# Altium PCB dht11-pcb.PcbDoc
Units mil, origin at the board's own origin, x right, y up, seen from the top; angles counter-clockwise.
Board outline 2115 x 2690 mil, 2 copper layers (Top Layer, Bottom Layer); 49 components, 31 nets, 189 pads, 154 vias.
Unrouted connection lines stored in the file: 35.
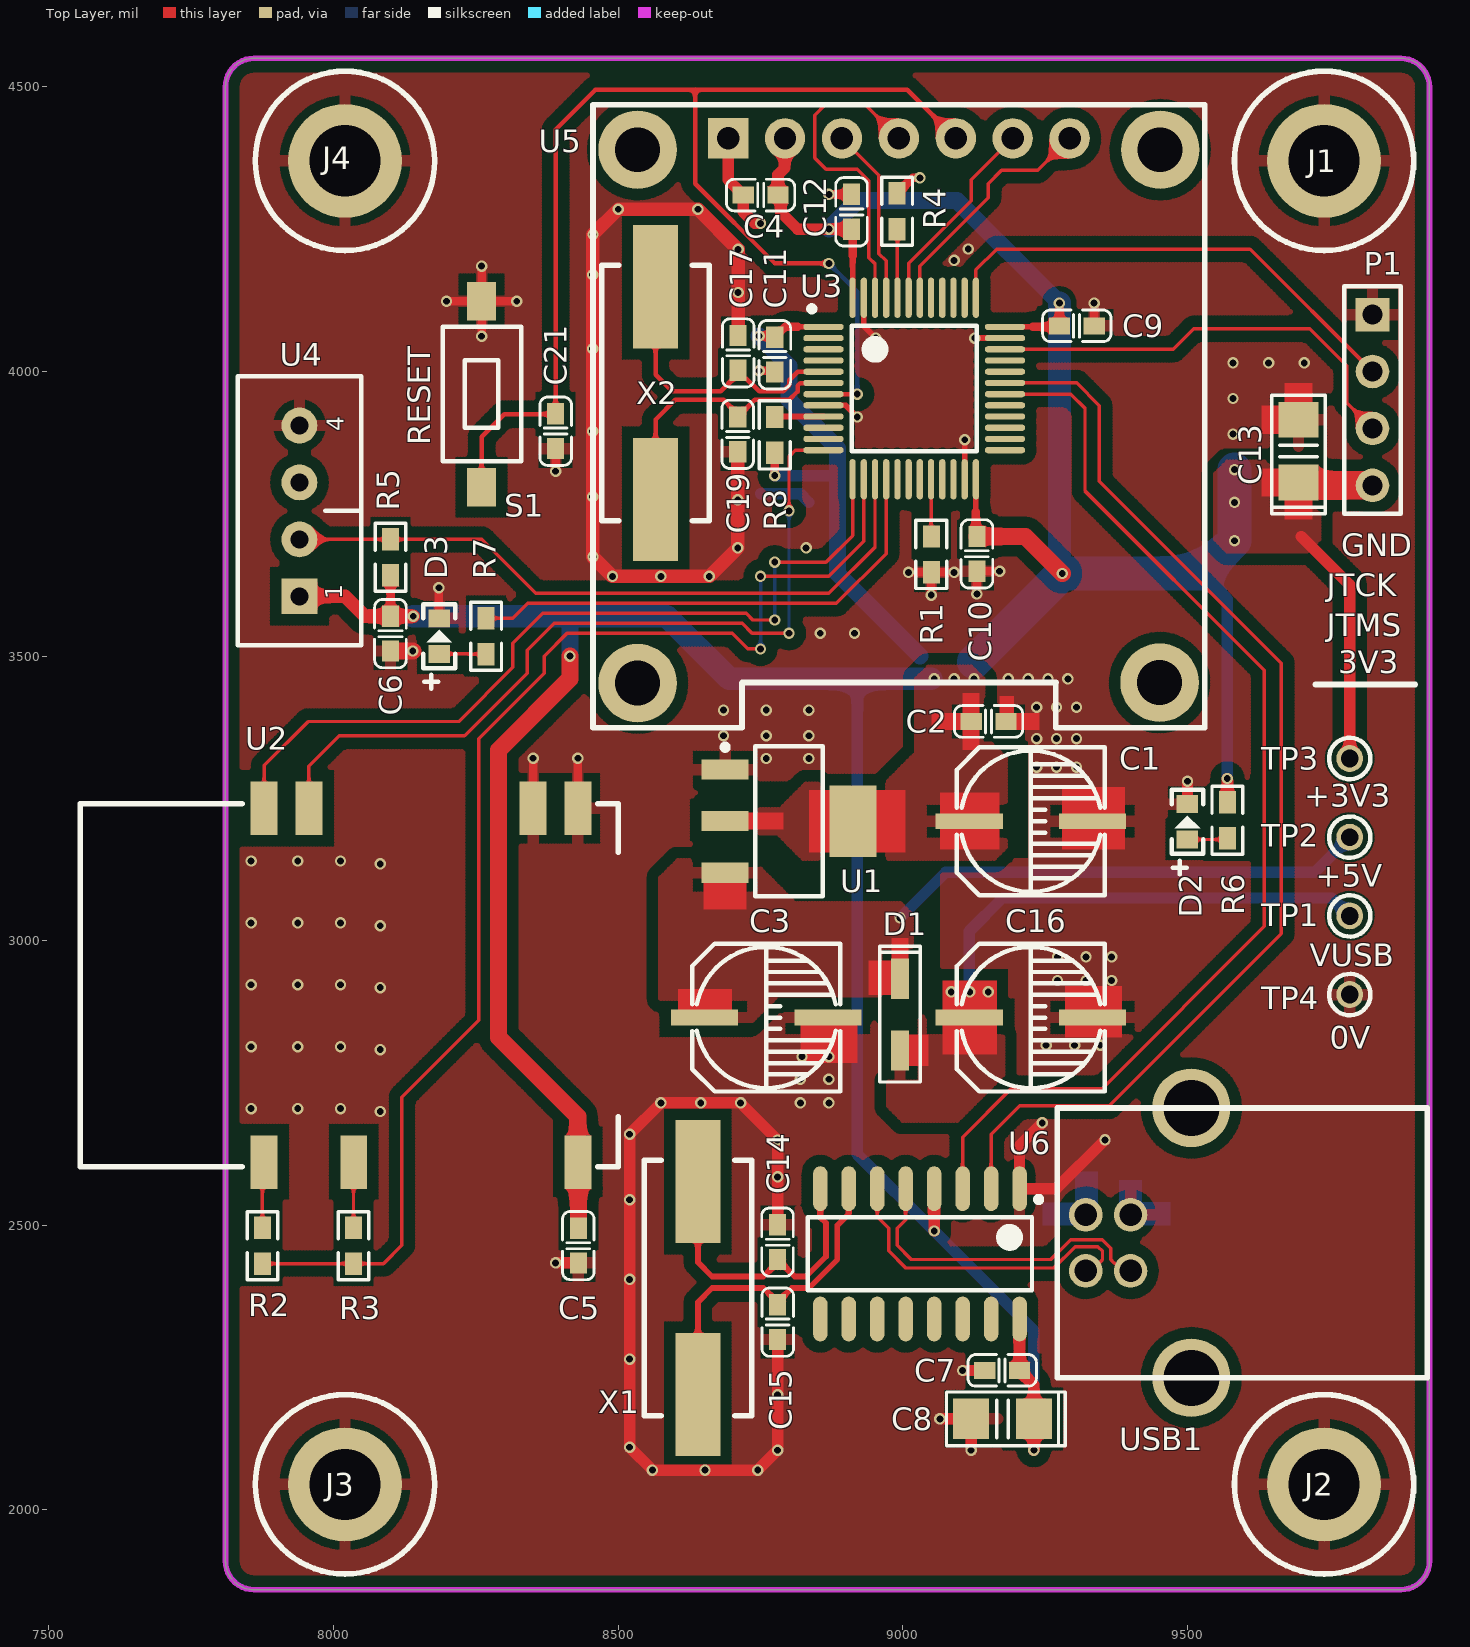
[diagram p0: Top Layer view]
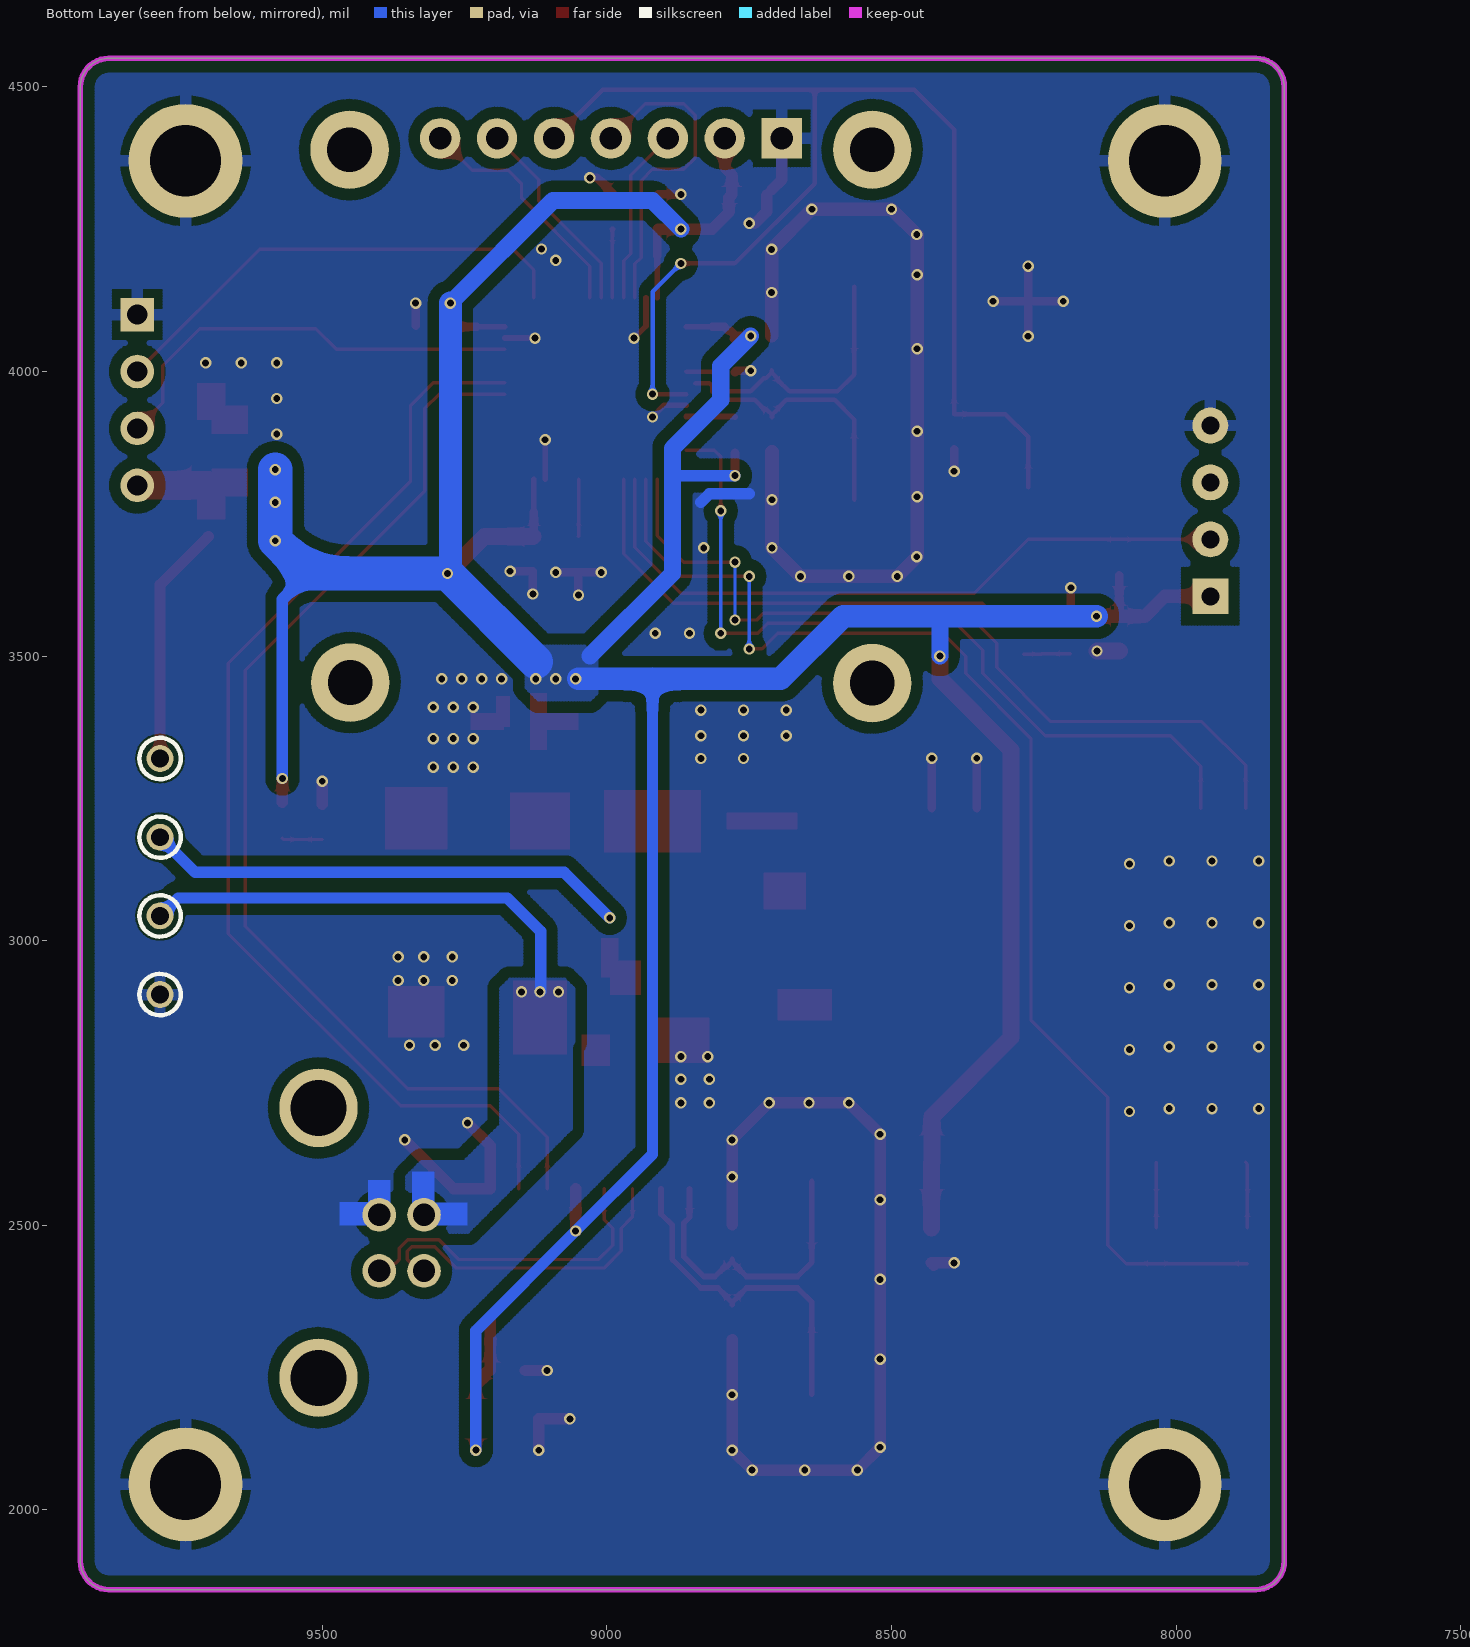
[diagram p1: Bottom Layer view, seen from below]
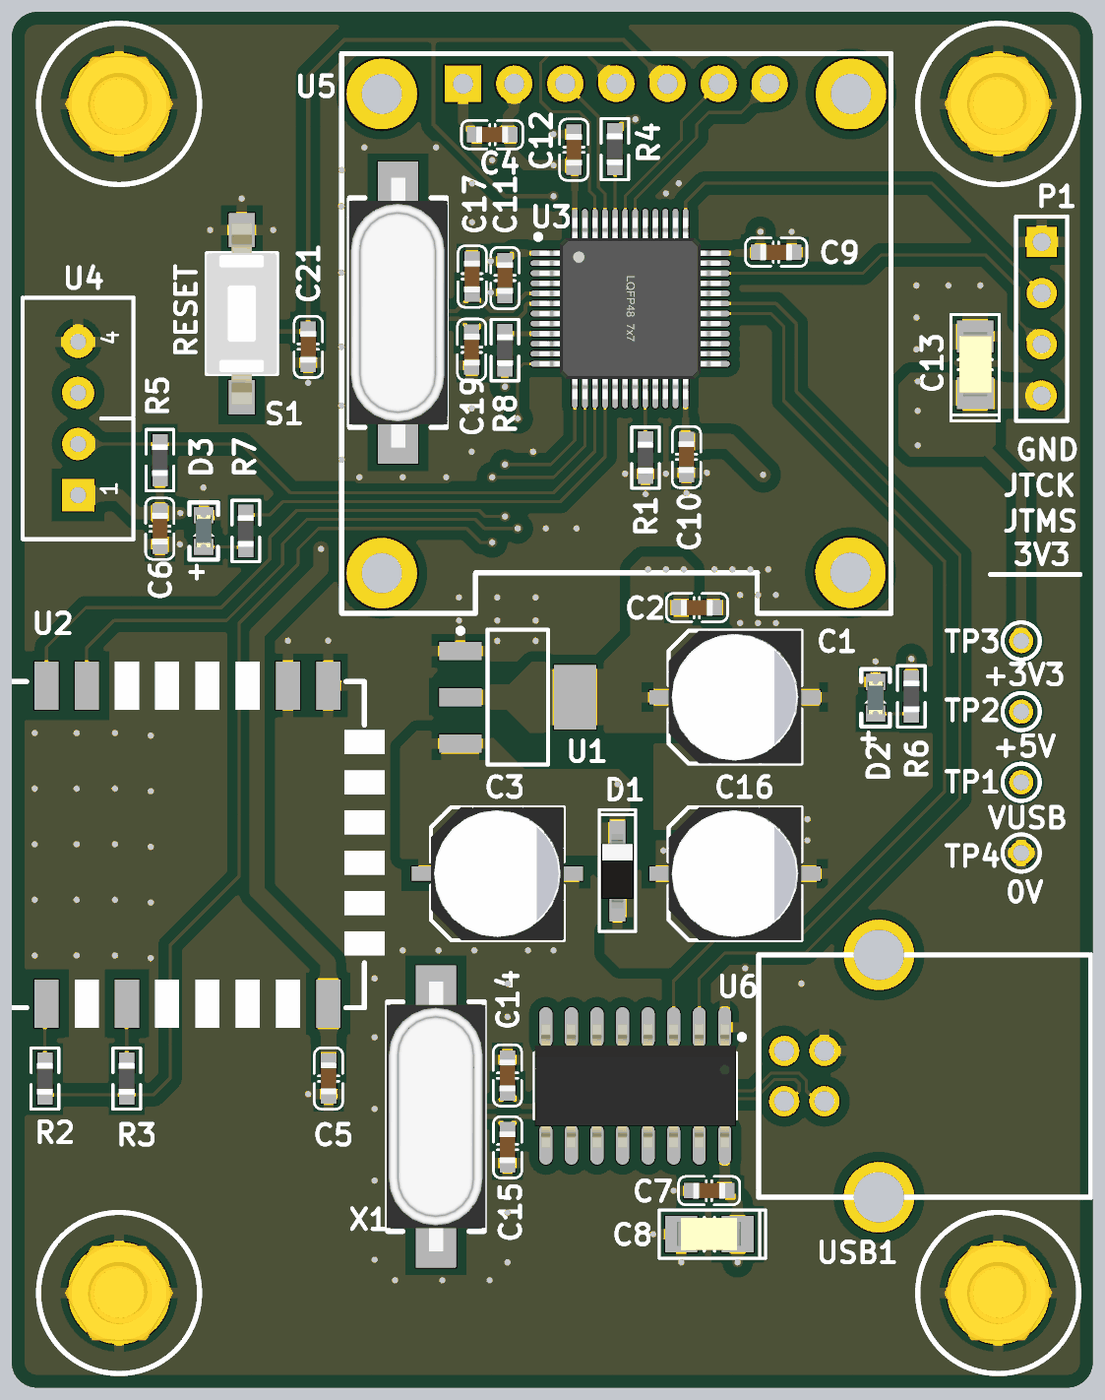
[diagram p2: 3D render of the assembled board from above, using the file's embedded part models]

## Layer stack, top to bottom
Top Solder: solder mask 0.4, Solder Resist, Dk 3.5
Top Layer: signal copper 1.4
Dielectric 1: dielectric 12.6, FR-4, Dk 4.8
Bottom Layer: signal copper 1.4
Bottom Solder: solder mask 0.4, Solder Resist, Dk 3.5

## Board outline
7810,1910 7810,4500 cw(c7860,4500) 7860,4550 9875,4550 cw(c9875,4500) 9925,4500 9925,1910 cw(c9875,1910) 9875,1860 7860,1860 cw(c7860,1910)

## Design rules (kind name [scope] priority, off if disabled: settings)
Clearance [All] p1: gap=6 ignorepadtopadclearanceinfootprint=TRUE except(10: Arc-Via Track-Via SMDPad-Via THPad-Via Via-Via; 20: Arc-Fill Arc-Poly Arc-Region Track-Fill Track-Poly Track-Region SMDPad-Fill SMDPad-Poly SMDPad-Region THPad-Fill THPad-Poly THPad-Region Via-Fill Via-Poly Via-Region Fill-Fill Fill-Poly Fill-Region Poly-Poly Poly-Region Region-Region)
PolygonConnect PolygonConnect_via [isvia] p1: connectstyle=Direct reliefconductorwidth=10 reliefentries=4 polygonreliefangle="90 Angle" airgapwidth=10
PolygonConnect [All] p2: connectstyle=Relief reliefconductorwidth=20 reliefentries=4 polygonreliefangle="90 Angle" airgapwidth=15
RoutingVias [All] p1: holewidth=12 width=24 viastyle="Through Hole" minholewidth=12 minwidth=24 maxholewidth=12 maxwidth=24
SolderMaskExpansion [All] p1: expansion=2.5
Width Width_POWER [InNetClass('POWER')] p1: maxlimit=60 minlimit=10 preferedwidth=15
Width [All] p2: maxlimit=10 minlimit=6 preferedwidth=6
30 further rules are at their usual default settings.

## Classes and differential pairs
net class MISC: LED0 NetC14_2 NetC15_2 NetD2_1 NetD3_1 NetR1_1 NetR2_2 NetR3_2 NetR4_1 NetR8_2 PA5/DATA WIFI_EN
net class USART: PA2/USART2_TXD PA3/USART2_RXD PA9/USART1_TXD PA10/USART1_RXD
net class OLED: OLED_CS OLED_D0 OLED_D1 OLED_DC
net class POWER: GND VCC_3V3 VCC_5V VCC_USB

## Components (designator, comment, footprint, x,y, rotation, side; value= is the part's Value field where it differs from the comment)
C1 "220uF" C_SMD(6.3x5.3) 9225,3210 r0 top
C2 "0.1uF" C0603 9150.51,3385 r180 top
C3 "220uF/10V" C_SMD(6.3x5.3) 8760,2865 r0 top
C4 "0.1uF" C0603 8750,4310 r0 top
C5 "0.1uF" C0603 8430,2464.49 r270 top
C6 "0.1uF" C0603 8100,3539.49 r270 top
C7 "0.1uF" C0603 9174.49,2245 r180 top
C8 "10uF" TAC1206 9175,2160 r180 top
C9 "0.1uF" C0603 9305.51,4080 r180 top
C10 "0.1uF" C0603 9130,3679.49 r90 top
C11 "0.1uF" C0603 8775,4029.49 r90 top
C12 "0.1uF" C0603 8910,4280.51 r270 top
C13 "10uF" TAC1206 9695,3860 r90 top
C14 "22pF" C0603 8780.02,2470.47 r270 top
C15 "22pF" C0603 8780.02,2329.96 r90 top
C16 "220uF/10V" C_SMD(6.3x5.3) 9225,2865 r0 top
C17 "22pF" C0603 8710.62,4032.46 r90 top
C19 "22pF" C0603 8710,3889.49 r270 top
C21 "0.1uF" C0603 8390,3895 r90 top
D1 "1N5819" SOD123 8995,2870 r90 top
D2 "LED" LED_0603 9500,3208.9 r90 top
D3 "LED" LED_0603 8185.69,3535 r90 top
J1 "Hole-3mmx6mm" M3x7+6_L 9740,4370 r0 top
J2 "Hole-3mmx6mm" M3x7+6_L 9740,2045 r0 top
J3 "Hole-3mmx6mm" M3x7+6_L 8020,2045 r0 top
J4 "Hole-3mmx6mm" M3x7+6_L 8020,4370 r0 top
P1 "Download" HDR1X4 9825,4099.88 r270 top
R1 "10K" R0603 9050,3678.5 r270 top
R2 "1K" R0603 7875,2464.19 r90 top
R3 "1K" R0603 8035,2464.19 r90 top
R4 "10K" R0603 8990,4281.5 r90 top
R5 "4K7" R0603 8100,3673.5 r270 top
R6 "1K" R0603 9570,3211.5 r270 top
R7 "1K" R0603 8268,3535 r270 top
R8 "0R" R0603 8775,3888.5 r90 top
S1 "SW-PB" "micro button_2_SMD" 8260,3960 r90 top
TP1 "VUSB" TP 9785,3043.56 r270 top
TP2 "+5V" TP 9785,3181.78 r270 top
TP3 "+3V3" TP 9785,3320 r270 top
TP4 "0V" TP 9785,2905.34 r270 top
U1 "AMS1117-3v3" SOT223_L 8800,3210 r0 top
U2 "ESP8266" ESP8266 8429.13,3240.59 r270 top
U3 "STM32F103C8T6" "LQFP48 7X7_N" 9020,3970 r270 top
U4 "DHT11" DHT11 7940,3755 r90 top
U5 "OLED_0R96" OLED_0.96_SPI 8993,3931 r0 top locked
U6 "CH340" SOIC_16 9030,2450 r270 top
USB1 "USB-B" USB-B 9321.26,2420 r90 top
X1 "12MHz" HC-49SMD 8640,2390 r90 top
X2 "8MHz" HC-49SMD 8565.62,3961.95 r90 top

## Footprints (in the part's own frame and the unit in brackets; to place one, negate y for a bottom-side part, rotate by r counter-clockwise, add the part's x,y. Pads: shape width x height; smd on the part's side, far side on the other; paste and mask are expansions set on the pad)
C0603 [mm] "Chip Capacitor, 2-Leads, Body 1.6x0.8mm, IPC Medium Density"
  rect 0.95x0.762 smd: 1(-0.775,0) 2(0.775,0)
  silkscreen extent -1.53,-0.71 1.53,0.7, body extent -0.8,-0.4 0.8,0.4, height 0.6
C_SMD(6.3x5.3) [mm]
  rect 3x0.7 smd: 1(-2.75,0) 2(2.75,0)
  silkscreen extent -3.3,-3.3 3.3,3.3, body extent -3.3,-3.3 3.3,3.3, height 5.42
DHT11 [mm]
  rect 1.6x1.6 hole 0.8: 1(-3.81,0)
  round 1.6 hole 0.8: 2(-1.27,0) 3(1.27,0) 4(3.81,0)
  silkscreen extent -6,-2.75 6,2.75
ESP8266 [mm]
  rect 2.4x1.2 smd: 1(0.2,0) 2(0.2,-2) 7(0.2,-12) 8(0.2,-14) 9(16,-14) 11(16,-10) 16(16,0)
  rect 2.4x1.2 on Top Overlay: 3(0.2,-4) 4(0.2,-6) 5(0.2,-8) 6(0.2,-10) 10(16,-12) 12(16,-8) 13(16,-6) 14(16,-4) 15(16,-2)
  rect 1.2x2 on Top Overlay: 17(13,1.8) 18(11,1.8) 19(9,1.8) 20(7,1.8) 21(5,1.8) 22(3,1.8)
  silkscreen extent 0,-22.2 16.2,1.8
HC-49SMD [mm]
  rect 5.5x2 smd: 1(-4.75,0) 2(4.75,0)
  silkscreen extent -5.7,-2.4 5.7,2.4, body extent -6.7,-2.46 6.7,2.44, height 4
HDR1X4 [mm] "Connector; Header; 4 Position"
  rect 1.5x1.5 hole 0.9: 1(0,0)
  round 1.5 hole 0.9: 2(2.54,0) 3(5.08,0) 4(7.62,0)
  silkscreen extent -1.27,-1.27 8.89,1.27
LED_0603 [mm]
  rect 0.8x0.96 smd: 1(-0.79,0) 2(0.79,0)
  silkscreen extent -2.35,-0.71 1.42,0.71, body extent -0.81,-0.4 0.81,0.4, height 0.6
"LQFP48 7X7_N" [mm] "7*7*1.4(长宽高，除引脚）"
  oval 0.279x1.8 smd: 1(-2.75,-4.05) 2(-2.25,-4.05) 3(-1.75,-4.05) 4(-1.25,-4.05) 5(-0.75,-4.05) 6(-0.25,-4.05) 7(0.25,-4.05) 8(0.75,-4.05) 9(1.25,-4.05) 10(1.75,-4.05) 11(2.25,-4.05) 12(2.75,-4.05) 25(2.75,4.05) 26(2.25,4.05) 27(1.75,4.05) 28(1.25,4.05) 29(0.75,4.05) 30(0.25,4.05) 31(-0.25,4.05) 32(-0.75,4.05) 33(-1.25,4.05) 34(-1.75,4.05) 35(-2.25,4.05) 36(-2.75,4.05)
  oval 1.8x0.279 smd: 13(4.05,-2.75) 14(4.05,-2.25) 15(4.05,-1.75) 16(4.05,-1.25) 17(4.05,-0.75) 18(4.05,-0.25) 19(4.05,0.25) 20(4.05,0.75) 21(4.05,1.25) 22(4.05,1.75) 23(4.05,2.25) 24(4.05,2.75) 37(-4.05,2.75) 38(-4.05,2.25) 39(-4.05,1.75) 40(-4.05,1.25) 41(-4.05,0.75) 42(-4.05,0.25) 43(-4.05,-0.25) 44(-4.05,-0.75) 45(-4.05,-1.25) 46(-4.05,-1.75) 47(-4.05,-2.25) 48(-4.05,-2.75)
  silkscreen extent -3.68,-4.7 2.79,2.79, body extent -4.5,-4.5 4.5,4.5, height 1.45
M3x7+6_L [mil] "M3铜柱，长：7mm，螺纹长：6mm"
  round 200 hole 125: 1(0,0)
  silkscreen extent -157,-157 157,157, body extent -106,-93 106,93, height 278
"micro button_2_SMD" [mm]
  rect 1.7x1.3 smd: 1(-4.15,0) 2(4.15,0)
  silkscreen extent -3,-1.76 3,1.74, body extent -4.5,-1.75 4.5,1.75, height 4.51
OLED_0.96_SPI [mm] "GND、VCC、SCL、SDA"
  round 3.5 hole 2 mask+0.102: 0(-11.659,-12.154) 0(-11.659,11.646) 0(11.633,-12.128) 0(11.659,11.646)
  rect 1.8x1.8 hole 1 mask+0.102: 1(-7.62,12.154)
  round 1.8 hole 1 mask+0.102: 2(-5.08,12.154) 3(-2.54,12.154) 4(0,12.154) 5(2.54,12.154) 6(5.08,12.154) 7(7.62,12.154)
  silkscreen extent -13.65,-14.15 13.65,13.65
R0603 [mm] "Chip Resistor, 2-Leads, Body 1.6x0.8mm, IPC Medium Density"
  rect 1x0.762 smd: 1(-0.8,0) 2(0.8,0)
  silkscreen extent -1.52,-0.69 1.52,0.69, body extent -0.8,-0.4 0.8,0.4, height 0.38
SOD123 [mm]
  rect 1.8x0.8 smd: 1(-1.6,0) 2(1.6,0)
  silkscreen extent -3,-0.9 3.05,0.9, body extent -1.85,-0.8 1.85,0.8, height 1.27
SOIC_16 [mm]
  oval 2x0.65 smd: 1(-2.906,4.445) 2(-2.906,3.175) 3(-2.906,1.905) 4(-2.906,0.635) 5(-2.906,-0.635) 6(-2.906,-1.905) 7(-2.906,-3.175) 8(-2.906,-4.445) 9(2.906,-4.445) 10(2.906,-3.175) 11(2.906,-1.905) 12(2.906,-0.635) 13(2.906,0.635) 14(2.906,1.905) 15(2.906,3.175) 16(2.906,4.445)
  silkscreen extent -2.55,-5 1.63,5.42, body extent -3.06,-5 3.06,5, height 1.48
SOT223_L [mm] "SOT223, 4-Leads, Body 6.5x3.5mm, Pitch 2.3mm, Lead Span 7mm, IPC High Density"
  rect 2.1x0.9 smd: 1(-2.85,2.3) 2(-2.85,0) 3(-2.85,-2.3)
  rect 2.1x3.2 smd: 4(2.85,0)
  silkscreen extent -2.97,-3.35 1.5,3.42, body extent -1.85,-3.35 1.85,3.35, height 1.7
TAC1206 [mm]
  rect 1.6x1.8 smd: 1(-1.4,0) 2(1.4,0)
  silkscreen extent -2.79,-1.2 2.5,1.2, body extent -1.56,-0.81 1.61,0.79, height 1.77
TP [mm]
  round 1.2 hole 0.8: 1(0,0)
  silkscreen extent -0.92,-0.92 0.92,0.92
USB-B [mm]
  round 3.5 hole 2.5: 0(-4.77,-4.71) 0(7.27,-4.71)
  round 1.5 hole 1: 1(2.5,0) 2(0,0) 3(0,-2) 4(2.5,-2)
  silkscreen extent -4.77,-15.24 7.27,1.27

## Part data
C1 C3 C16: library part Cap3, "CAP ALUM POLY 150UF 20% 10V SMD", ESR (Equivalent Series Resistance)="22 mOhm", Lifetime @ Temp.="2000 Hrs @ 105°C", Manufacturer=KEMET, Manufacturer Part Number=A765EB157M1ALAE022, Operating Temperature="-55°C ~ 105°C", Package / Case="Radial, Can - SMD", Ratings=-, Supplier Part Number 1=399-13671-1-ND, Tolerance=±20%, Applications="General Purpose", Category=Capacitors, ComponentLink1Description=https://api.kemet.com/component-edge/download/datasheet/A765EB157M1ALAE022.pdf, ComponentLink1URL=https://api.kemet.com/component-edge/download/datasheet/A765EB157M1ALAE022.pdf, Height - Seated (Max)="0.236\" (6.00mm)", Lead Spacing=-, Mounting Type="Surface Mount", Packaging="Cut Tape (CT)", Part Status=Active, Pricing 1="1=0.62, 10=0.44, 100=0.2899, 500=0.2147 (USD)", RoHS="RoHS Compliant", Size / Dimension="0.248\" Dia (6.30mm)", Stock 1=2690, Supplier 1=Digi-Key, Surface Mount Land Size="0.260\" L x 0.260\" W (6.60mm x 6.60mm)", Type=Polymer
C2 C4 C5 C6 C7 C9 C10 C11 C12 C14 C15 C17 C19 C21: library part Cap1, "CAP CER 10000PF 100V X7R 0603", Manufacturer="TDK Corporation", Manufacturer Part Number=C1608X7R2A103K080AA, Operating Temperature="-55°C ~ 125°C", Package / Case="0603 (1608 Metric)", Ratings=-, Supplier Part Number 1=445-1304-2-ND, Temperature Coefficient=X7R, Tolerance=±10%, Voltage - Rated=100V, Applications="General Purpose", Category=Capacitors, ComponentLink1Description=https://product.tdk.com/info/en/catalog/datasheets/mlcc_commercial_midvoltage_en.pdf, ComponentLink1URL=https://product.tdk.com/info/en/catalog/datasheets/mlcc_commercial_midvoltage_en.pdf, Failure Rate=-, Features=-, Height - Seated (Max)=-, Lead Spacing=-, Lead Style=-, Mounting Type="Surface Mount, MLCC", Notification="Current market demand for these product types have resulted in fluctuating and extending lead times. Lead times may differ.", Packaging="Tape & Reel (TR)", Part Status=Active, Pricing 1="4000=0.01438 (USD)", RoHS="RoHS Compliant", Size / Dimension="0.063\" L x 0.032\" W (1.60mm x 0.80mm)", Stock 1=40000, Supplier 1=Digi-Key, Thickness (Max)="0.035\" (0.90mm)"
C8 C13: library part Cap2, "CAP TANT 10UF 10V 10% 1206", ESR (Equivalent Series Resistance)="3.8 Ohm", Lifetime @ Temp.="2000 Hrs @ 125°C", Manufacturer=KEMET, Manufacturer Part Number=T491A106K010AT7280, Manufacturer Size Code=A, Operating Temperature="-55°C ~ 125°C", Package / Case="1206 (3216 Metric)", Supplier Part Number 1=399-8268-2-ND, Tolerance=±10%, Category=Capacitors, ComponentLink1Description=https://api.kemet.com/component-edge/download/datasheet/T491A106K010AT7280.pdf, ComponentLink1URL=https://api.kemet.com/component-edge/download/datasheet/T491A106K010AT7280.pdf, Failure Rate=-, Features="General Purpose", Height - Seated (Max)="0.071\" (1.80mm)", Lead Spacing=-, Mounting Type="Surface Mount", Notification="Current market demand for these product types have resulted in fluctuating and extending lead times. Lead times may differ.", Packaging="Tape & Reel (TR)", Part Status=Active, Pricing 1="9000=0.084, 18000=0.08138, 27000=0.07875, 63000=0.0735 (USD)", RoHS="RoHS Compliant", Size / Dimension="0.126\" L x 0.063\" W (3.20mm x 1.60mm)", Stock 1=27000, Supplier 1=Digi-Key, Type=Molded
D1: library part Diode, "Default Diode", Code_JEDEC=DO-214-AB, LatestRevisionDate=17-Jul-2002, LatestRevisionNote="Re-released for DXP Platform.", PackageDescription="DO-214-AB/SMC; 2 C-Bend Leads; Body 7.9 x 5.9 mm, inc. leads (LxW)", PackageReference=SMC, PackageVersion=Sep-1996, Published=8-Jun-2000, Publisher="Altium Limited"
D2 D3: "Typical RED GaAs LED", LatestRevisionDate=08-Jul-2005, LatestRevisionNote="Mech Layer 1 removed.", PackageDescription="LED; 2 Leads", PackageReference=LED-1, Published=8-Jun-2000, Publisher="Altium Limited"
J1 J2 J3 J4: library part HOLED
P1 USB1: library part "Header 4", "Header, 4-Pin", LatestRevisionDate=17-Jul-2002, LatestRevisionNote="Re-released for DXP Platform.", Publisher="Altium Limited"
R1 R2 R3 R4 R5 R6 R7 R8: library part R, "贴片电阻", BOM名称=贴片电阻, 学习资源=www.ooocke.com, 版权归属=源创客
S1: "Switch", LatestRevisionDate=17-Jul-2002, LatestRevisionNote="Re-released for DXP Platform.", PackageDescription="Switch; 2 Leads", PackageReference=SPST-2, Published=24-Mar-1999, Publisher="Altium Limited"
TP1 TP2 TP3: library part TP+, "正测试环"
TP4: library part TP-, "负测试环"
U2: library part "ESP8266 Module"
U3: "ARM Cortex-M3 32-bit MCU, 64 KB Flash, 20 KB Internal RAM, 37 I/Os, 48-pin LQFP, -40 to 85 degC, Tray", I/Os (High Current)=37, Operating Frequency(F) (Processor speed) (MHz)=72, Supplier Part Number 1=497-6063-ND, Supply Voltage(Vcc) min (V)=2, A/D Converter="2x12-bit (10 Channel)", ComponentLink1Description="Manufacturer URL", ComponentLink1URL=http://www.st.com/web/en/home.html, ComponentLink2Description=Datasheet, ComponentLink2URL=http://www.st.com/st-web-ui/static/active/en/resource/technical/document/datasheet/CD00161566.pdf, ComponentLink3Description="Package Specification", ComponentLink3URL=http://www.st.com/st-web-ui/static/active/en/resource/technical/document/datasheet/DM00058181.pdf, Core="ARM Cortex-M3", DatasheetVersion="Rev. 16", FLASH Size (Prog) (kB)=64, Internal RAM Size (kB)=20, Mounting Technology="Surface Mount", PackageDescription="48-Pin Low Profile Quad Flat Package, 7 x 7 mm Body, 0.5 mm Pitch", PackageReference=LQFP48, PackageVersion="Rev. 6, 06/2013", Packing=Tray, PartNumber=STM32F103C8T6, Supplier 1=Digi-Key, Supplier 2=Farnell, Supplier 3=Newark, Supplier 4=Newark, Supplier 5=Mouser, Supplier Part Number 2=1447637, Supplier Part Number 3=59M2182, Supplier Part Number 4=57P1222, Supplier Part Number 5=511-STM32F103C8T6
U4: "GROVE TEMP/HUMIDITY SENSOR", Manufacturer="Seeed Technology Co., Ltd", Manufacturer Part Number=101020011, Supplier Part Number 1=1597-1124-ND, Category="Development Boards, Kits, Programmers", ComponentLink1Description=http://www.seeedstudio.com/wiki/Grove-_Temperature_and_Humidity_Sensor, ComponentLink1URL=http://www.seeedstudio.com/wiki/Grove-_Temperature_and_Humidity_Sensor, Contents="Board(s), Cable(s)", Function="Humidity, Temperature", Part Status=Active, Platform=Grove, Pricing 1="1=6.02 (USD)", RoHS="RoHS Compliant", Stock 1=94, Supplier 1=Digi-Key, Type=Sensor, Utilized IC / Part=DHT11
U5: library part OLED_7P_0R96
X1 X2: library part Crystal, "CRYSTAL 12.0000MHZ 18PF SMD", Frequency Stability=±50ppm, Frequency Tolerance=±20ppm, Load Capacitance=18pF, Manufacturer="Abracon LLC", Manufacturer Part Number=ABLS-12.000MHZ-B2-T, Operating Mode=Fundamental, Operating Temperature="-20°C ~ 70°C", Package / Case=HC-49/US, Ratings=-, Supplier Part Number 1=535-9067-2-ND, Category="Crystals, Oscillators, Resonators", ComponentLink1Description=https://abracon.com/Resonators/abls.pdf, ComponentLink1URL=https://abracon.com/Resonators/abls.pdf, Height - Seated (Max)="0.165\" (4.20mm)", Mounting Type="Surface Mount", Packaging="Tape & Reel (TR)", Part Status=Active, Pricing 1="1000=0.136, 3000=0.1275, 5000=0.12325, 10000=0.119 (USD)", RoHS="RoHS Compliant", Size / Dimension="0.449\" L x 0.185\" W (11.40mm x 4.70mm)", Stock 1=85000, Supplier 1=Digi-Key, Type="MHz Crystal"

## Via types
v1: diameter 20, hole 12, Top Layer to Bottom Layer, tented both sides, 154 vias

## Nets (pads, with @x,y where several pads share a name; then routed paths per layer and width w, separated by ;. In a path a pad name is that pad's centre, name@x,y a point inside that pad or via, vN(x,y) a via of type N, cw(c..) or ccw(c..) an arc to the next point about the centre after c; other vN are vias at no path point)
D+: U6.5 USB1.3 | length 575
  Top Layer w6: U6.5 9005,2510 8990,2495 8990,2465 9015,2440 9260,2440 9295,2475 9350,2475 9365,2460 9365,2440 9371.26,2433.74 9371.9,2433.74 9385.64,2420 USB1.3
D-: U6.6 USB1.2 | length 576.9
  Top Layer w6: U6.6 8955,2515 8975,2495 8975,2455 9005,2425 9265,2425 9302.5,2462.5 9342.5,2462.5 9350.78,2454.22 9350.78,2440 9330.78,2420 USB1.2
GND: C1.2 C2.1 C3.2 C4.1 C5.2 C6.2 C7.2 C8.2 C9.1 C10.1 C11.1 C12.1 C13.2 C14.1 C15.1 C16.2 C17.2 C19.2 C21.1 D2.2 D3.2 J1.1 J2.1 J3.1 J4.1 P1.1 R1.2 R4.2 S1.2 TP4.1 U1.1 U2.1 U2.2 U3.8 U3.23 U3.35 U3.47 U4.4 U5.1 U6.1 USB1.4 | length 4966.8
  Top Layer w10: U3.8 8899.53,3940.47 v1(8920,3920) ; U3.47 8931.42,4079.67 v1(8952.5,4058.58) ; U3.23 v1(9108.58,3880) ; v1(9126.42,4058.58) U3.35
  Top Layer w15: v1(8185,3620) 8185,3566.79 D3.2 ; v1(8198.39,4123.39) S1.2 ; v1(8260,4061.77) S1.2 ; v1(8260,4185) S1.2 ; v1(8321.61,4123.39) S1.2 ; U2.2 v1(8350.39,3320.39) ; v1(8390,3824.53) C21.1@8390,3863.5 ; U2.1 v1(8429.13,3320.39) ; v1(8747.44,4001.25) 8772.73,4001.25 C11.1 ; v1(8870,4311.02) C12.1 ; R4.2 9017.01,4340 v1(9030,4340) ; v1(9010,3647.01) R1.2 ; v1(9050,3607.01) R1.2 ; v1(9090,3647.01) R1.2 ; v1(9130,3608.98) C10.1 v1(9170,3648.98) ; C9.1 v1(9336.02,4120)
  Top Layer w20: v1(8390,2433.98) C5.2 C5.2@8426.02,2430 ; U5.1 8693,4336.49 C4.1@8710.79,4318.7 ; C4.1 8719.49,4280.51 8740,4260 v1(8750,4260) ; C15.1 v1(8780.02,2105.02) v1(8745,2070) v1(8560,2070) v1(8520,2110) v1(8520,2660) v1(8575,2715) v1(8715,2715) v1(8780.02,2649.98) C14.1 ; v1(9065,2160) C8.2 ; v1(9105,2245) C7.2 ; v1(9119.88,2105) C8.2@9119.88,2159.88 ; v1(9245,2680) 9205,2640 U6.1 9269.43,2564.43 v1(9355,2650) ; D2.2 v1(9500,3280)
  Top Layer w24: C19.2 v1(8710,3690) v1(8660,3640) v1(8490,3640) 8455,3675 8455,4240 v1(8500,4285) v1(8640,4285) v1(8710.62,4214.38) C17.2
  Top Layer w30: C6.2 v1(8138.98,3508.98)
  Bottom Layer w20: 8750,3785 8820,3785 8835,3770
  other v1: 8652.5,2070 8780.02,2202.23 8520,2265 8520,2405 8520,2545 8780,2585 8082.05,2700 7855,2705 7937.05,2705 8012.05,2705 8645,2715 8820,2715 8870,2715 8820,2756.46 8870,2756.46 8822.73,2796.46 8870,2796.46 8082.05,2808.75 7855,2813.75 7937.05,2813.75 8012.05,2813.75 9251.73,2816.46 9301.73,2816.46 9346.73,2816.46 8082.05,2917.5 7855,2922.5 7937.05,2922.5 8012.05,2922.5 9271.73,2930 9321.73,2930 9366.73,2930 9271.73,2971.46 9321.73,2971.46 9366.73,2971.46 8082.05,3026.25 7855,3031.25 7937.05,3031.25 8012.05,3031.25 8082.05,3135 7855,3140 7937.05,3140 8012.05,3140 9235,3305 9270,3305 9305,3305 8760,3320 8835,3320 9235,3355 9270,3355 9305,3355 8685,3360 8760,3360 8835,3360 8685,3405 8760,3405 8835,3405 9235,3410 9270,3410 9305,3410 9185,3460 9220,3460 9255,3460 9290,3460 8855,3540 8915,3540 8575,3640 8455.6,3674.4 8830,3690 8710,3774.49 8455,3780 9580,3890 8455,3895 9580,3952.5 9580,4015 9642.5,4015 9705,4015 8455,4040 8710.62,4138.68 8455,4170 9090,4195 9115,4215 8455.6,4240.6
JTCK: P1.2 U3.37 | length 849.9
  Top Layer w6: U3.37 9128.27,4178.27 9165,4215 9609.88,4215 P1.2
JTMS: P1.3 U3.34 | length 771.2
  Top Layer w6: U3.34 9475,4038.9 9511.1,4075 9715,4075 9779.94,4010.06 9779.94,3944.94 P1.3
LED0: R7.1 U3.16 | length 880.4
  Top Layer w6: R7.1 8315,3566.5 8341,3592.5 8883.29,3592.5 8970.79,3680 U3.16
NetC14_2: C14.2 U6.8 X1.2 | length 541.6
  Top Layer w10: X1.2 8640,2435 8665,2410 8755,2410 8770.02,2425.02 8770.02,2426.26 C14.2@8780.02,2436.26 ; C14.2 C14.2@8780.02,2436.26 ; U6.8 8855,2514 8865,2504 8865,2445 8830,2410 8809.98,2410 8793.72,2426.26 8790.02,2426.26 C14.2@8780.02,2436.26
NetC15_2: C15.2 U6.7 X1.1 | length 596.8
  Top Layer w10: X1.1 8640,2365 8665,2390 8755,2390 8770.02,2374.98 8770.02,2374.17 C15.2@8780.02,2364.17 ; C15.2 C15.2@8780.02,2364.17 ; U6.7 8905,2520 8885,2500 8885,2440 8835,2390 8805,2390 8790.02,2375.02 8790.02,2374.17 C15.2@8780.02,2364.17
NetD2_1: D2.1 R6.2 | length 70.9
  Top Layer w6: D2.1 9567.8,3177.8 R6.2
NetD3_1: D3.1 R7.2 | length 82.5
  Top Layer w6: D3.1 8236.2,3503.9 8236.59,3503.5 R7.2
NetR1_1: R1.1 U3.20 | length 100.7
  Top Layer w6: U3.20 9049.53,3710.47 R1.1
NetR2_2: R2.2 U2.9 | length 116.2
  Top Layer w6: R2.2 7875,2607.72 U2.9
NetR3_2: R3.2 U2.11 | length 115.2
  Top Layer w6: R3.2 8035,2610.24 U2.11
NetR4_1: R4.1 U3.44 | length 120.7
  Top Layer w6: U3.44 R4.1@8990.47,4249.53
  Top Layer w10: R4.1 R4.1@8990.47,4249.53
NetR8_2: R8.2 U3.9 | length 85.9
  Top Layer w10: R8.2 8775.79,3920.79 U3.9
NRST: C21.2 S1.1 U3.7 U5.5 | length 2269.9
  Top Layer w8: S1.1 8260,3885 8300,3925 8390,3925 C21.2 8390,4425 8460,4495 8635,4495 ; U3.7 v1(8919.84,3960.16) ; v1(8870,4189.69) 8775.31,4189.69 8635,4330 8635,4495 ; U5.5 9007.5,4495 8635,4495
  Bottom Layer w8: v1(8870,4189.69) 8919.84,4139.84 v1(8919.84,3960.16)
OLED_CS: U3.42 U5.7 | length 426.3
  Top Layer w6: U3.42 9029.84,4184.84 9150,4305 9150,4330 9173.25,4353.25 9236.75,4353.25 U5.7
OLED_D0: U3.45 U5.3 | length 312.3
  Top Layer w6: U5.3 8957.89,4344.61 8957.89,4207.11 8970.79,4194.21 U3.45
OLED_D1: U3.46 U5.4 | length 578.1
  Top Layer w6: U3.46 8951.1,4188.9 8940,4200 8940,4335 8920,4355 8865,4355 8845,4375 8845,4450 8865,4470 8932.5,4470 U5.4
OLED_DC: U3.43 U5.6 | length 355.8
  Top Layer w6: U3.43 9010.16,4190.16 9120,4300 9120,4336.5 U5.6
OSC_IN: C17.1 U3.5 X2.2 | length 514.1
  Top Layer w8: X2.2 8565.62,3994.38 8595,3965 8680,3965 8700.62,3985.62 8700.62,3988.25 C17.1@8710.62,3998.25 ; C17.1 C17.1@8710.62,3998.25 ; U3.5 8824.53,3999.53 8815.47,3999.53 8800.52,3984.57 8800.52,3975.52 8790,3965 8747.57,3965 8724.32,3988.25 8720.62,3988.25 C17.1@8710.62,3998.25
OSC_OUT: C19.1 U3.6 X2.1 | length 478.9
  Top Layer w8: X2.1 8565.62,3915.62 8600,3950 8685,3950 8700,3935 8700,3933.7 C19.1@8710,3923.7 ; C19.1 C19.1@8710,3923.7 ; U3.6@8845.16,3979.65 8819.96,3979.65 8815,3974.69 8815,3964.69 8800.31,3950 8740,3950 8723.7,3933.7 8720,3933.7 C19.1@8710,3923.7
PA2/USART2_TXD: U2.7 U3.12 | length 1427.6
  Top Layer w6: U2.7 7956.69,3306.69 8010,3360 8230,3360 8340,3470 8340,3510 8387.5,3557.5 8717.5,3557.5 8735,3540 v1(8800,3540) ; v1(8800,3755) 8800,3850.6 8811.13,3861.73 U3.12
  Bottom Layer w6: v1(8800,3540) v1(8800,3755)
PA3/USART2_RXD: U2.8 U3.13 | length 1467.5
  Top Layer w6: U2.8 7877.95,3307.95 7955,3385 8220,3385 8315,3480 8315,3522.5 8367.5,3575 8725,3575 8736.67,3563.33 v1(8775,3563.33) ; v1(8775,3665) 8865,3665 8911.73,3711.73 U3.13
  Bottom Layer w6: v1@8775,3565 v1(8775,3665)
PA5/DATA: R5.1 U3.15 U4.2 | length 1203.5
  Top Layer w6: U4.2 R5.1 8260,3705 8355,3610 8870,3610 8951.1,3691.1 U3.15
PA9/USART1_TXD: U3.30 U6.3 | length 1965.3
  Top Layer w6: U6.3 9105,2655 9190,2740 9350,2740 9635,3025 9635,3475 9320,3790 9320,3935 9294.84,3960.16 U3.30
PA10/USART1_RXD: U3.31 U6.2 | length 1993.6
  Top Layer w6: U6.2 9155,2660 9205,2710 9362.43,2710 9665,3012.57 9665,3487.43 9345,3807.43 9345,3940 9305.16,3979.84 U3.31
VCC_3V3: C1.1 C2.2 C4.2 C5.1 C6.1 C7.1 C8.1 C9.2 C10.2 C11.2 C12.2 C13.1 P1.4 R5.2 R6.1 R8.1 TP3.1 U1.2 U1.4 U2.16 U3.1 U3.24 U3.36 U3.48 U4.1 U5.2 U6.4 U6.16 | length 8614.7
  Top Layer w10: 8815.28,4078.27 U3.1 ; U3.48 8911.73,4203.27 ; 9128.27,3753.27 U3.24 ; U3.36 9228.27,4078.27
  Top Layer w15: C6.1 R5.2 ; v1(8747.44,4062.27) C11.2@8772.73,4062.27 ; v1(8775,3817.01) R8.1 ; C11.2@8777.51,4057.49 C11.2 8775,4063.7 8782.5,4071.2 8786.2,4071.2 8793.27,4078.27 8815.28,4078.27 ; C12.2 8911.73,4248.27 8911.73,4203.27 ; 9128.27,3753.27 9128.27,3711.73 C10.2 ; 9228.27,4078.27 9273.27,4078.27 C9.2 v1(9275,4120)
  Top Layer w20: U2.16 U2.16@8430,2609.8 ; U5.2 8792.48,4408.98 8792.48,4357.48 8780.51,4345.51 C4.2 8780.82,4310 8785.82,4305 8785.82,4279.18 8815,4250 v1(8870,4250) C12.2 ; v1(9055,2490) U6.4 ; U6.16 C7.1 9208.7,2245 9213.7,2240 9213.7,2236.3 9230,2220 9230,2160.12 C8.1 v1(9230.12,2105.12) ; R6.1 v1(9570,3285) ; 9700,3710 9785,3625 TP3.1
  Top Layer w24: U4.1 8020,3605 8055,3570 C6.1 v1(8140,3570)
  Top Layer w30: v1(8415,3500) 8415,3460 8290,3335 8290,2830 8429.13,2690.87 U2.16 ; C5.1 U2.16@8430,2609.8 ; C10.2 9215,3710 v1(9280,3645) ; C13.1 C13.1@9700,3799.88
  Top Layer w50: C13.1@9700,3799.88 P1.4
  Bottom Layer w20: v1(8775,3817.01) 8882.99,3817.01 ; 8920,3460 8920,2625 v1(9055,2490) 9230.12,2314.88 v1(9230.12,2105.12) ; v1@9275,3650 v1(9280,3645) ; 9525,3645 9570,3600 v1(9570,3285)
  Bottom Layer w30: v1(8415,3500) 8415,3570 ; v1(8747.44,4062.27) 8800,4009.71 8800,3950 8885,3865 8885,3645 9030,3500 ; v1(8870,4250) 8920,4300 9095,4300 v1(9275,4120)
  Bottom Layer w40: v1(8140,3570) 8415,3570 8585,3570 8695,3460 8920,3460 v1@9050,3460 ; v1@9275,3650 v1(9275,4120)
  Bottom Layer w60: 9125,3490 v1(9280,3645) 9525,3645 v1(9582.5,3702.5) v1(9582.5,3827.5)
  other v1: 9055,3460 9090,3460 9125,3460 9582.5,3770
VCC_5V: C3.1 D1.2 TP2.1 U1.3 | length 848.7
  Bottom Layer w20: v1(8995,3040) 9075,3120 9723.22,3120 TP2.1
VCC_USB: C16.1 D1.1 TP1.1 USB1.1 | length 812.7
  Bottom Layer w20: v1(9117.5,2910) 9116.46,2911.04 9116.46,3016.46 9175,3075 9753.56,3075 TP1.1
  other v1: 9085,2910 9150,2910
WIFI_EN: R2.1 R3.1 U3.14 | length 2248.4
  Top Layer w6: R2.1 R3.1 8087.69,2432.69 8120,2465 8120,2725 8255,2860 8255,3355 8370,3470 8370,3500 8410,3540 8700,3540 8727.5,3512.5 v1(8750,3512.5) ; v1(8750,3640) 8870,3640 8931.42,3701.42 U3.14
  Bottom Layer w6: v1(8750,3512.5) v1(8750,3640)
pads on no net: U2.3 U2.4 U2.5 U2.6 U2.10 U2.12 U2.13 U2.14 U2.15 U2.17 U2.18 U2.19 U2.20 U2.21 U2.22 U3.2 U3.3 U3.4 U3.10 U3.11 U3.17 U3.18 U3.19 U3.21 U3.22 U3.25 U3.26 U3.27 U3.28 U3.29 U3.32 U3.33 U3.38 U3.39 U3.40 U3.41 U4.3 U5.0 U6.9 U6.10 U6.11 U6.12 U6.13 U6.14 U6.15 USB1.0

## Polygon pours and split planes (outlines as drawn)
GND on Top Layer "GND_L01_P034" (hatched 90Degree grid 5 track 10, remove dead copper, pour order 34): 7810,1910 7810,4500 cw(c7860,4500) 7860,4550 9875,4550 cw(c9875,4500) 9925,4500 9925,1910 cw(c9875,1910) 9875,1860 7860,1860 cw(c7860,1910)
GND on Top Layer "GND_L01_P028" (hatched 90Degree grid 5 track 10, remove dead copper, pour order 28): 8645,3285 8645,3415 8685,3455 8860,3455 8900,3415 8900,3320 8865,3285
GND on Top Layer "GND_L01_P024" (hatched 90Degree grid 5 track 10, remove dead copper, pour order 24): 9160,3370 9210,3370 9225,3355 9225,3170 9255,3140 9375,3140 9395,3160 9395,3290 9315,3370 9315,3460 9290,3485 9190,3485 9160,3455
VCC_3V3 on Top Layer "VCC_3V3_L01_P022" (hatched 90Degree grid 5 track 10, remove dead copper, pour order 22): 8645,3230 8785,3230 8830,3275 8970,3275 9025,3330 9025,3460 9045,3480 9120,3480 9140,3460 9140,3360 9180,3320 9180,3165 9160,3145 8825,3145 8780,3190 8645,3190
GND on Top Layer "GND_L01_P018" (hatched 90Degree grid 5 track 10, remove dead copper, pour order 18): 9395,2995 9395,2835 9355,2795 9235,2795 9225,2805 9225,2960 9260,2995
GND on Top Layer "GND_L01_P014" (hatched 90Degree grid 5 track 10, remove dead copper, pour order 14): 8817.5,2692.5 8917.5,2692.5 8930,2705 8930,2880 8805,2880 8805,2705
VCC_5V on Top Layer "VCC_5V_L01_P008" (hatched 90Degree grid 5 track 10, remove dead copper, pour order 8): 8725,2850 8780,2905 9005,2905 9015,2915 9015,3045 8995,3065 8810,3065 8735,3140 8605,3140 8575,3110 8575,2850
VCC_USB on Top Layer "VCC_L02_P-001" (hatched 90Degree grid 5 track 10, remove dead copper, pour order 4): 9175,2880 9050,2880 9015,2845 8975,2845 8975,2710 9000,2685 9100,2685 9175,2760
VCC_3V3 on Top Layer "VCC_3V3_L01_P002" (hatched 90Degree grid 5 track 10, remove dead copper, pour order 2): 9730,3840 9730,3705 9710,3685 9570,3685 9550,3705 9550,3820 9570,3840
GND on Top Layer "GND_L01_P000" (hatched 90Degree grid 5 track 10, remove dead copper, pour order 0): 9730,3880 9730,4015 9710,4035 9570,4035 9550,4015 9550,3900 9570,3880
GND on Top Layer "GND_L01_P016" (hatched 90Degree grid 5 track 10, remove dead copper, pour order 16): 9275,2855
GND on Top Layer "GND_L01_P012" (hatched 90Degree grid 5 track 10, remove dead copper, pour order 12): 8805,2900
GND on Top Layer "GND_L01_P010" (hatched 90Degree grid 5 track 10, remove dead copper, pour order 10): 8780,2815
GND on Bottom Layer "VCC_L02_P-001" (hatched 90Degree grid 5 track 10, remove dead copper, pour order 29): 7810,1910 7810,4500 cw(c7860,4500) 7860,4550 9875,4550 cw(c9875,4500) 9925,4500 9925,1910 cw(c9875,1910) 9875,1860 7860,1860 cw(c7860,1910)
VCC_USB on Bottom Layer "VCC_USB_L02_P006" (hatched 90Degree grid 5 track 10, remove dead copper, pour order 6): 9245,2490 9060,2675 9060,2915 9075,2930 9170,2930 9185,2915 9185,2675 9250,2610 9325,2610 9350,2585 9350,2490
VCC_3V3 on Bottom Layer "VCC_3V3_L02_P026" (hatched 90Degree grid 5 track 10, remove dead copper, pour order 26): 9020,3435 9020,3495 9040,3515 9120,3515 9140,3495 9140,3445 9120,3425 9030,3425
GND on Bottom Layer "GND_L02_P020" (hatched 90Degree grid 5 track 10, remove dead copper, pour order 20): 9220,3000 9385,3000 9415,2970 9415,2665 9490,2590 9490,2500 9475,2485 9395,2485 9380,2500 9380,2595 9340,2635 9265,2635 9220,2680

## Keep-outs
Keep-Out Layer:
  lines w10: 7810,1910 ccw(c7860,1910) 7860,1860 9875,1860 ccw(c9875,1910) 9925,1910 9925,4500 ccw(c9875,4500) 9875,4550 7860,4550 ccw(c7860,4500) 7810,4500 7810,4365 7810,1910

## Other copper
Top Layer:
  rectangle net GND: 9280,3160 9390,3270
  rectangle net GND: 9170,3375 9195,3430
  rectangle net GND: 9181.02,3370 9240,3400
  rectangle net VCC_3V3: 9050,3370 9120,3400
  rectangle net VCC_3V3: 9105,3335 9135,3435
  rectangle net VCC_3V3: 9065,3160 9170,3260
  rectangle net VCC_3V3: 8835,3155 9005,3265
  rectangle net VCC_3V3: 8665,3195 8790,3225
  rectangle net GND: 9285,2830 9385,2920
  rectangle net GND: 8820,2785 8920,2865
  rectangle net VCC_5V: 8980,2935 9010,3005
  rectangle net VCC_5V: 8940,2905 8995,2965
  rectangle net VCC_5V: 8605,2860 8700,2915
  rectangle net VCC_5V: 8650,3055 8725,3119.45
  rectangle net VCC_USB: 8995,2780 9045,2835
  rectangle net VCC_USB: 9070,2865 9165,2930
  rectangle net VCC_USB: 9070,2800 9165,2865
  region net VCC_3V3: 9720,3804.88 9670,3804.88 9670,3740 9720,3740
  region net VCC_3V3: 9695,3779.88 9695,3829.88 9630.12,3829.88 9630.12,3779.88
  region net GND: 9695,3890.12 9695,3940.12 9630.12,3940.12 9630.12,3890.12
  rectangle net GND: 9670,3915.12 9720,3980
  pour cut-out: 8635,4480 8835,4480 8905,4410 9085,4410 9125,4370 9125,4280 9085,4240 8859.14,4240 8820,4200.86 8764.14,4200.86 8635,4330
  pour cut-out: 8638.24,2841.43 8746.43,2841.43 8785,2880 8925,2880 8970,2835 9060,2835 9070,2845 9070,3115 9045,3140 9220,3140 9225,3145 9225,3345 9235,3355 9022.48,3355 8957.48,3290 8665,3290 8630,3255 8630,3150 8645,3135 8645,2840.33 8639.67,2835
Bottom Layer:
  rectangle net GND: 9380,2515 9420,2580
  rectangle net GND: 9400,2500 9470,2540.69
  region net VCC_USB: 9302.83,2594.68 9302.83,2514.68 9342.83,2514.68 9342.83,2594.68
  rectangle net VCC_USB: 9245,2500 9325,2540

## Silkscreen, mask and mechanical layers (free items; w line width, h text height)
Top Overlay:
  lines w10: 9725,3450 9900,3450
  text "RESET" at 8170,3870 h40 r90
  text "GND" at 9770,3675 h40
  text "JTCK" at 9745,3605 h40
  text "JTMS" at 9745,3535 h40
  text "3V3" at 9765,3470 h40

## Text inside footprints (layer, text, board x,y; h text height)
U4: Top Overlay "1" at 8015,3600 h30 r90; Top Overlay "4" at 8017.8,3895.16 h30 r90